# Altium PCB BMS_V5.PcbDoc
Units mm, origin at the board's own origin, x right, y up, seen from the top; angles counter-clockwise.
Board outline 100 x 100 mm, 2 copper layers (Top Layer, Bottom Layer); 68 components, 40 nets, 156 pads, 41 vias.
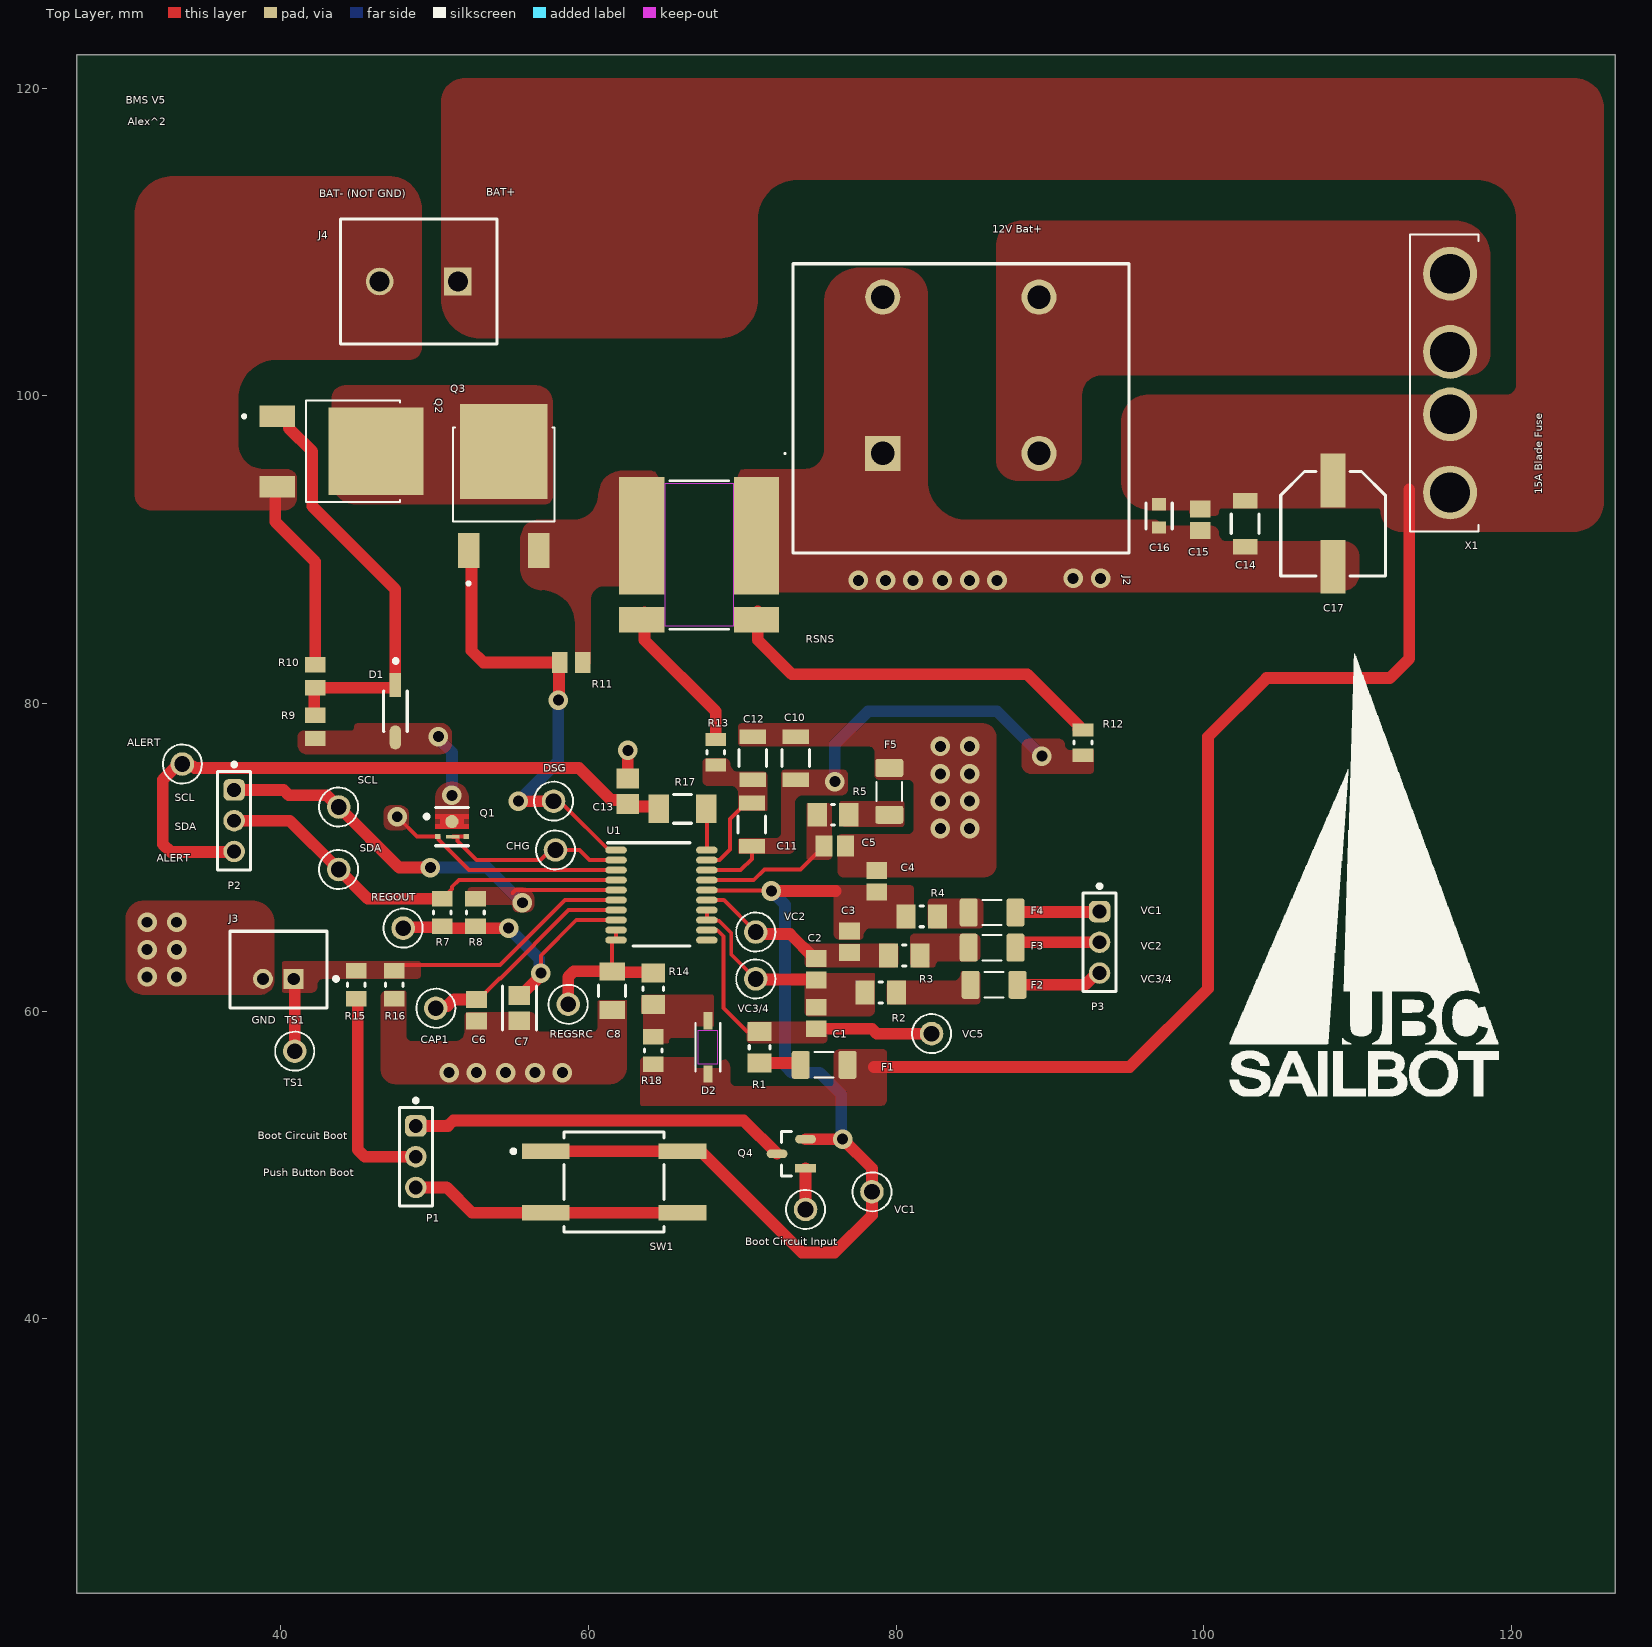
[diagram p0: Top Layer view]
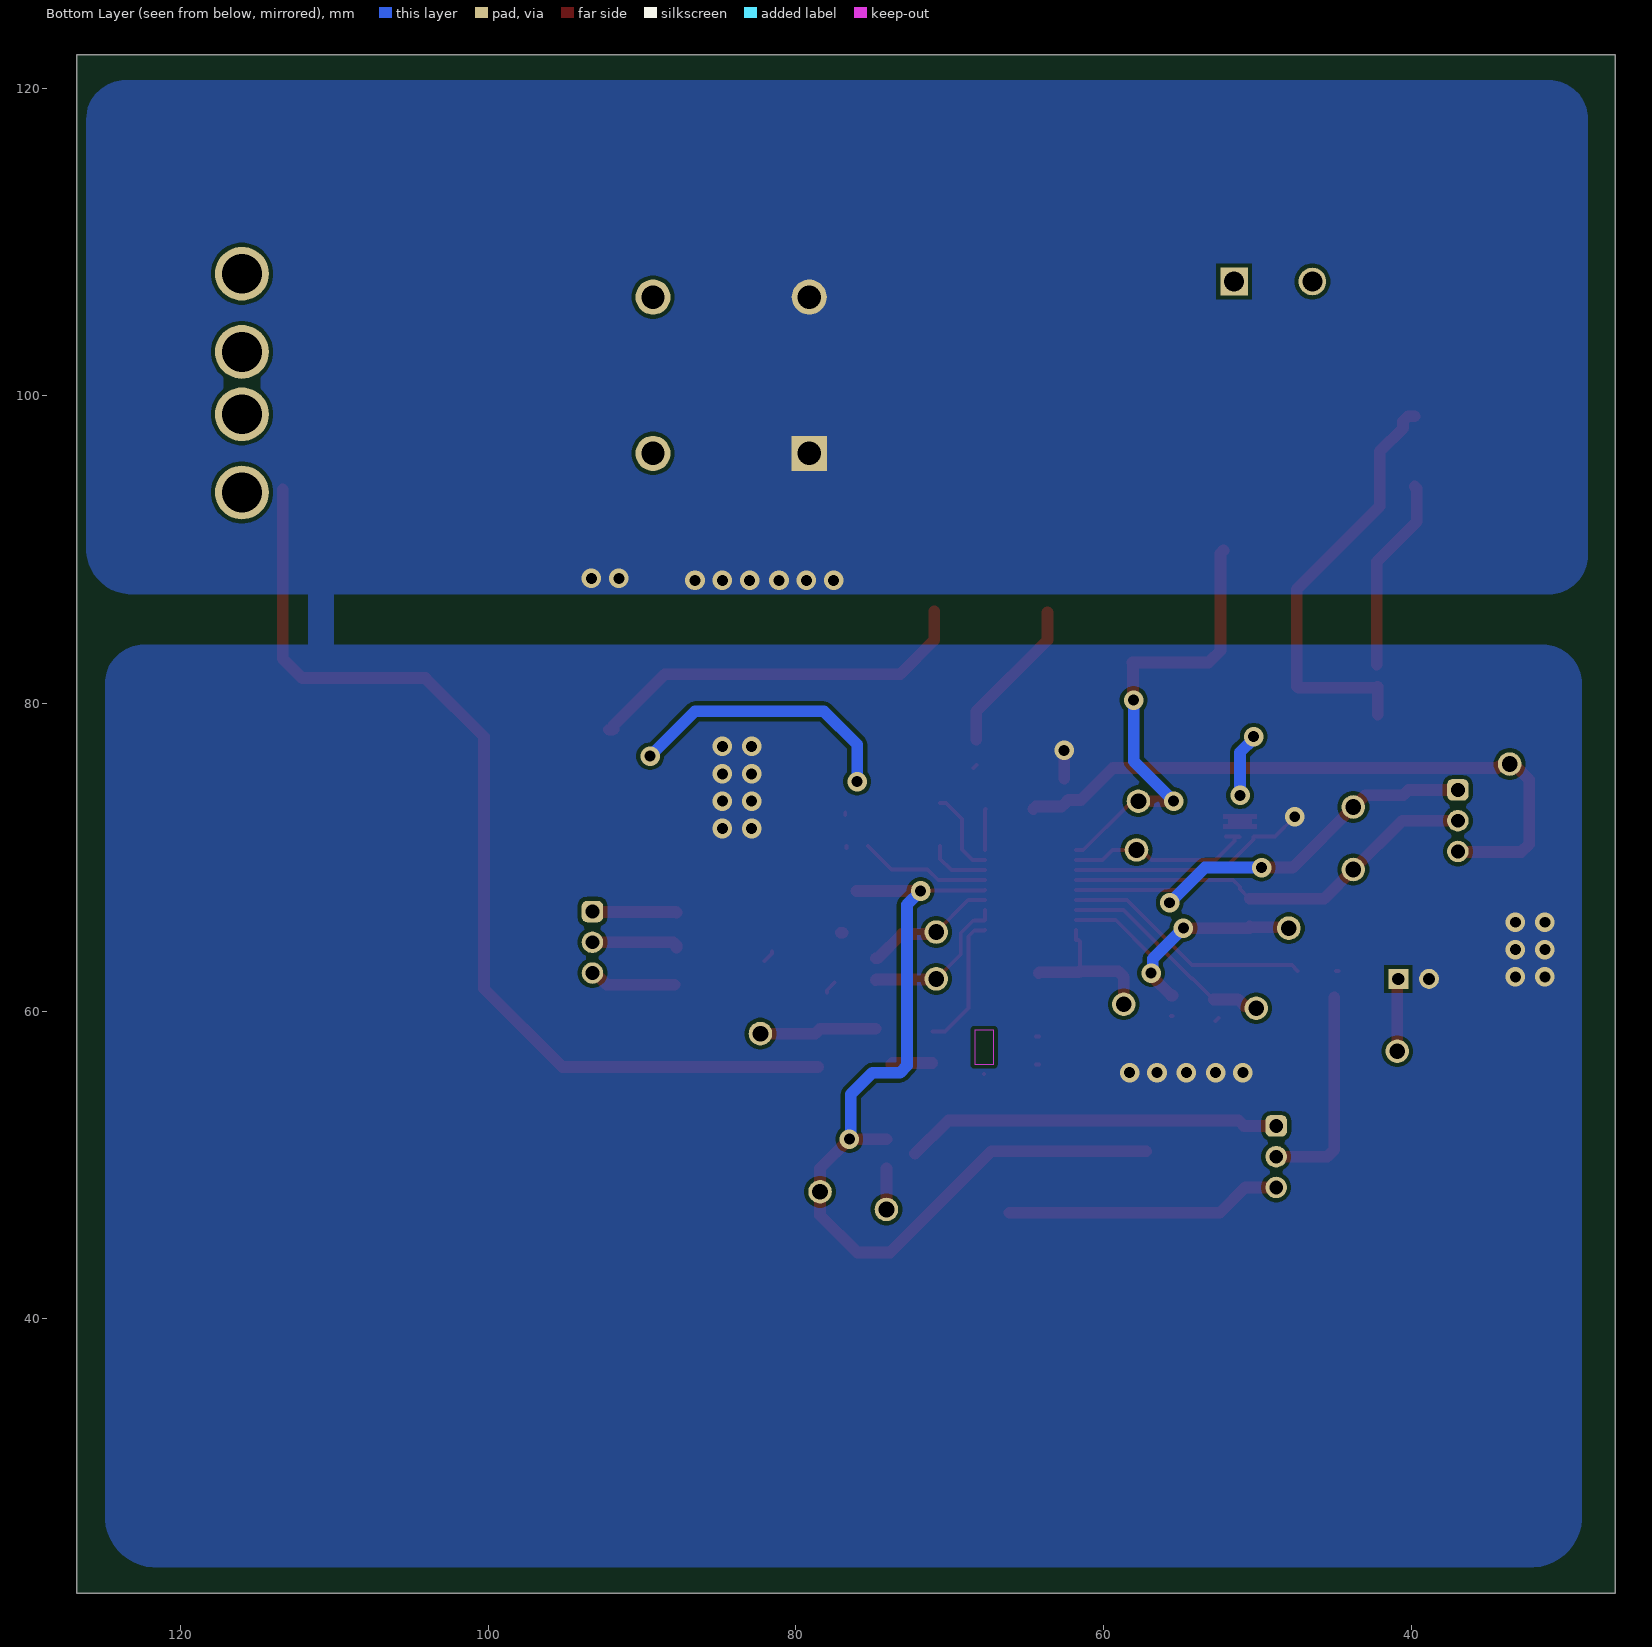
[diagram p1: Bottom Layer view, seen from below]

## Layer stack, top to bottom
Top Solder: solder mask 0.0102, Solder Resist, Dk 3.5
Top Layer: signal copper 0.0356
Dielectric 1: dielectric 0.32, FR-4, Dk 4.8
Bottom Layer: signal copper 0.0356
Bottom Solder: solder mask 0.0102, Solder Resist, Dk 3.5

## Board outline
26.733,22.174 26.733,122.174 126.734,122.174 126.734,22.174

## Design rules (kind name [scope] priority, off if disabled: settings)
Clearance [All] p1: gap=0.254 ignorepadtopadclearanceinfootprint=TRUE
HoleSize [All] p1: absolutevalues=TRUE maxlimit=2.59 minlimit=0.025 maxpercent=80.000 minpercent=20.000
PolygonConnect [All] p1: connectstyle=Direct reliefconductorwidth=0.254 reliefentries=4 polygonreliefangle="90 Angle" airgapwidth=0.254
RoutingVias [All] p1: holewidth=0.711 width=1.27 viastyle="Through Hole" minholewidth=0.711 minwidth=1.27 maxholewidth=0.711 maxwidth=1.27
SilkToSolderMaskClearance [IsPad] p1: minsilkscreentomaskgap=0.178 clearancetoexposedcopper=TRUE
SolderMaskExpansion [All] p1: expansion=0.102 istentingtop=FALSE
SupplyNets "Schematic Supply Nets_1" [InNet('BAT+')] p1: voltage=0.000
SupplyNets "Schematic Supply Nets" [InNet('GND')] p2: voltage=0.000
Width [All] p1: maxlimit=0.762 minlimit=0.254 preferedwidth=0.762
28 further rules are at their usual default settings.

## Components (designator, comment, footprint, x,y, rotation, side; value= is the part's Value field where it differs from the comment)
ALERT "5001" KEYSTONE_5001 33.591,76.073 r0 top
"Boot Circuit Input" "5001" KEYSTONE_5001 74.105,47.117 r90 top
C1 "1uF" CAPC2013X140X50LL20T25 74.803,59.563 r270 top
C2 "1uF" CAPC2013X140X50LL20T25 74.803,62.738 r270 top
C3 "1uF" CAPC2013X140X50LL20T25 76.962,64.516 r270 top
C4 "1uF" CAPC2013X140X50LL20T25 78.74,68.453 r270 top
C5 "1uF" CAPC2013X140X50LL20T25 76.01,70.739 r0 top
C6 "1uF" CAPC2013X140X50LL20T25 52.705,60.071 r90 top
C7 "GRM21BR61H475KE51L" FP-GRM21B-0_15-IPC_B 55.499,60.198 r270 top
C8 "TMK316B7225KLHT" FP-1206-L_3_2_0_15-W_1_6-IPC_C 61.531,61.341 r270 top
C10 "C1206C104M4JACAUTO" FP-C1206C-EB-MFG 73.469,76.454 r90 top value="0.10 μF"
C11 "C1206C104M4JACAUTO" FP-C1206C-EB-MFG 70.612,72.136 r270 top value="0.10 μF"
C12 "C1206C104M4JACAUTO" FP-C1206C-EB-MFG 70.675,76.454 r270 top value="0.10 μF"
C13 "470pF" CAPC2013X145X48NL20T23 62.547,74.295 r90 top
C14 "12061C104KAZ2A" FP-1206-L_3_2_0_2-W_1_6_0-MFG 102.679,91.694 r270 top
C15 "1uF" CAPC2013X140X50LL20T25 99.758,91.948 r90 top
C16 "CC0603KRX7R9BB103" FP-CC0603-DA-MFG 97.091,92.202 r270 top value="10 nF"
C17 "865080545012" WCAP-ASLI_D6.3H7.7 108.394,91.694 r90 top
CAP1 "5001" KEYSTONE_5001 50.068,60.198 r0 top
CHG "5001" KEYSTONE_5001 57.848,70.485 r0 top
D1 "1N5819HW" FP-SOD123-IPC_A 47.434,79.502 r270 top
D2 "1N4148W-7-F" SOD123_DIO 67.754,57.658 r270 top
DSG "5001" KEYSTONE_5001 57.721,73.66 r0 top
F1 "0ZCJ0005FF2E" FUSC3216X85N 75.311,56.515 r0 top
F2 "0ZCJ0005FF2E" FUSC3216X85N 86.36,61.722 r0 top
F3 "0ZCJ0005FF2E" FUSC3216X85N 86.233,64.135 r0 top
F4 "0ZCJ0005FF2E" FUSC3216X85N 86.233,66.421 r0 top
F5 "0ZCJ0005FF2E" FUSC3216X85N 79.546,74.295 r90 top
J2 "39970-0102" 399700102 79.121,96.266 r0 top
J3 "440054-2" FP-440054-2-MFG 39.83,62.703 r0 top
J4 "1729128" PHOE-1729128-2_V 48.959,107.442 r180 top
P1 "62000311121" 62000311121 48.768,50.546 r270 top
P2 "62000311121" 62000311121 36.957,72.39 r270 top
P3 "62000311121" 62000311121 93.218,64.484 r270 top
Q1 "SQA405EJ-T1_GE3" FP-SQA405EJ-T1_GE3-MFG 51.117,72.009 r270 top
Q2 "TSM090N03CPROG" TRANS_TSM090N03CP_ROG 43.942,96.393 r0 top
Q3 "TSM090N03CP_ROG" TRANS_TSM090N03CP_ROG 54.483,94.148 r90 top
Q4 "2N7002NXAKR" FP-SOT23-IPC_B 73.179,50.734 r180 top
R1 "100" RESC2013X60X30ML20T20 71.12,57.658 r90 top
R2 "100" RESC2013X60X30ML20T20 78.994,61.214 r180 top
R3 "100" RESC2013X60X30ML20T20 80.518,63.627 r180 top
R4 "100" RESC2013X60X30ML20T20 81.661,66.167 r180 top
R5 "100" RESC2013X60X30ML20T20 75.882,72.771 r180 top
R7 "10K" RESC2013X60X35NL10T20 50.482,66.421 r270 top
R8 "10K" RESC2013X60X35NL10T20 52.642,66.421 r270 top
R9 "1M Ohm" RESC2013X60X40LL20T25 42.227,78.486 r270 top
R10 "ERA-6AEB105V" RESC2013X60X40LL20T25 42.227,81.788 r270 top
R11 "ERA-6AEB105V" RESC2013X60X40LL20T25 58.864,82.677 r180 top
R12 "100" RESC2013X50X30LL20T20 92.138,77.47 r270 top
R13 "100" RESC2013X50X30LL20T20 68.263,76.835 r270 top
R14 "100" RESC2013X60X30ML20T20 64.198,61.468 r270 top
R15 "10K" RESC2013X60X35NL10T20 44.895,61.722 r270 top
R16 "10K" RESC2013X60X35NL10T20 47.371,61.722 r270 top
R17 "" FP-CRMA1206-IPC_A 66.103,73.152 r0 top
R18 "10K" RESC2013X60X35NL10T20 64.198,57.448 r90 top
REGOUT "5001" KEYSTONE_5001 47.942,65.405 r0 top
REGSRC "5001" KEYSTONE_5001 58.674,60.452 r90 top
RSNS "WSL36375L000FEA" WSL3637_VIS 67.183,89.662 r180 top (schematic designator Rsns)
SCL "5001" KEYSTONE_5001 43.752,73.279 r0 top
SDA "5001" KEYSTONE_5001 43.752,69.215 r0 top
SW1 "1571634-2" FP-1571634-2-MFG 61.658,48.895 r0 top
TS1 "5001" KEYSTONE_5001 40.894,57.404 r0 top
U1 "BQ7692006PW" PW0020A_N 64.735,67.553 r0 top
VC1 "5001" KEYSTONE_5001 78.422,48.26 r0 top
VC2 "5001" KEYSTONE_5001 70.866,65.151 r0 top
VC3/4 "5001" KEYSTONE_5001 70.866,62.103 r0 top
VC5 "5001" KEYSTONE_5001 82.296,58.547 r0 top
X1 "3522-2" FUSE_3522-2 115.633,100.838 r270 top

## Footprints (in the part's own frame and the unit in brackets; to place one, negate y for a bottom-side part, rotate by r counter-clockwise, add the part's x,y. Pads: shape width x height; smd on the part's side, far side on the other; paste and mask are expansions set on the pad)
399700102 [mm]
  rect 2.28x2.28 hole 1.52: 1(0,0)
  round 2.28 hole 1.52: 2(0,10.16) 3(10.16,0) 4(10.16,10.16)
  silkscreen extent -6.4,-6.47 16,12.33
62000311121 [mm] "Pin Header, pitch 2.00 mm, THT, Vertical, single row, 3p"
  rrect50% 1.4x1.4 hole 0.9: 1(-2,0)
  round 1.4 hole 0.9: 2(0,0) 3(2,0)
  silkscreen extent -3.77,-1.07 3.2,1.07, body extent -3,-1 3,1, height 6.05
CAPC2013X140X50LL20T25 [mm] "Chip Capacitor, 2-Leads, Body 2.00x1.25mm, IPC High Density"
  rect 1.1x1.35 smd: 1(-0.7,0) 2(0.7,0)
  body extent -1.1,-0.72 1.1,0.72, height 1.4
CAPC2013X145X48NL20T23 [mm] "Chip Capacitor, 2-Leads, Body 2.00x1.25mm, IPC Medium Density"
  rect 1.3x1.45 smd: 1(-0.825,0) 2(0.825,0)
  body extent -1.1,-0.72 1.1,0.72, height 1.45
FP-1206-L_3_2_0_2-W_1_6_0-MFG [mm]
  rect 1x1.6 smd paste+0 mask+0: 1(-1.5,0) 2(1.5,0)
  silkscreen extent -0.63,-0.9 0.63,0.9, body extent -2.1,-1 2.1,1, height 0.25
FP-1206-L_3_2_0_15-W_1_6-IPC_C [mm]
  rect 1.155x1.658 smd paste+0 mask+0: 1(-1.251,0) 2(1.251,0)
  silkscreen extent -0.37,-0.87 0.37,0.87, body extent -1.93,-0.97 1.93,0.97, height 0.25
FP-440054-2-MFG [mm]
  rect 1.3x1.3 hole 0.8 paste-2539.97 mask+0: 1(1,-0.6)
  round 1.3 hole 0.8 paste-2539.97 mask+0: 2(-1,-0.6)
  silkscreen extent -3.15,-2.5 3.88,2.5, body extent -3.25,-2.6 3.25,2.6, height 0.25
FP-1571634-2-MFG [mm]
  rect 3.1x1 smd paste+0 mask+0: 1(-4.45,2) 2(4.45,2) 3(-4.45,-2) 4(4.45,-2)
  silkscreen extent -6.67,-3.25 3.25,3.25, body extent -6.1,-3.35 6.1,3.35, height 0.25
FP-C1206C-EB-MFG [mm]
  rect 0.95x1.7 smd paste+0 mask+0: 1(-1.4,0) 2(1.4,0)
  silkscreen extent -0.55,-0.9 0.55,0.9, body extent -2,-1 2,1, height 0.25
FP-CC0603-DA-MFG [mm]
  rect 0.8x0.9 smd paste+0 mask+0: 1(-0.75,0) 2(0.75,0)
  silkscreen extent -0.85,-0.85 0.85,0.85, body extent -1.35,-0.75 1.35,0.75, height 0.25
FP-CRMA1206-IPC_A [mm]
  rect 1.343x1.858 smd paste+0 mask+0: 1(-1.548,0) 2(1.548,0)
  silkscreen extent -0.58,-0.93 0.58,0.93, body extent -2.72,-1.43 2.72,1.43, height 0.25
FP-GRM21B-0_15-IPC_B [mm]
  rect 1.206x1.408 smd paste+0 mask+0: 1(-0.826,0) 2(0.826,0)
  silkscreen extent -1.43,-1.1 1.43,1.1, body extent -1.68,-0.95 1.68,0.95, height 0.25
FP-SOD123-IPC_A [mm]
  rect 1.557x0.742 smd paste+0 mask+0: 1(-1.7,0)
  rrect100% 1.557x0.742 smd paste+0 mask+0: 2(1.7,0)
  silkscreen extent -3.39,-0.77 1.33,0.77, body extent -2.98,-1.28 2.98,1.28, height 0.25
FP-SOT23-IPC_B [mm]
  rect 1.355x0.562 smd paste+0 mask+0: 1(-0.925,0.95)
  rrect100% 1.355x0.562 smd paste+0 mask+0: 2(-0.925,-0.95) 3(0.925,0)
  silkscreen extent 0,-1.45 0.65,1.45, body extent -1.85,-1.7 1.85,1.7, height 0.25
FP-SQA405EJ-T1_GE3-MFG [mm]
  round 0.855 smd paste+0 mask+0: 1-2-5-6(-0.325,0)
  rect 0.3x0.35 smd paste+0 mask+0: 3(0.65,-0.925) 4(0.65,0.925)
  rect 0.235x0.87 smd paste+0 mask+0: 7(0.667,0.04)
  Top Layer region: -0.8,1.1 -0.8,-1.1 -0.5,-1.1 -0.5,-0.75 -0.15,-0.75 -0.15,-1.1 0.15,-1.1 0.15,1.1 -0.15,1.1 -0.15,0.75 -0.5,0.75 -0.5,1.1 -0.8,1.1
  silkscreen extent -1.25,-1.77 1.25,1.07, body extent -1.17,-1.2 1.17,1.2, height 0.25
FUSC3216X85N [mm]
  rrect25% 1.17x1.82 smd paste+0 mask+0.102: 1(-1.52,0) 2(1.52,0)
  silkscreen extent -0.62,-0.82 0.62,0.82
FUSE_3522-2 [mm]
  round 3.5 hole 2.59: 1A(-7.11,0.37) 1B(-2.03,0.37) 2A(2.03,0.37) 2B(7.11,0.37)
  silkscreen extent -9.65,-2.22 9.65,2.22
KEYSTONE_5001 [mm]
  round 1.53 hole 1.02: TP(0,0)
  silkscreen extent -1.27,-1.27 1.27,1.27, body extent -1.27,-1.27 1.27,1.27, height 4.57
PHOE-1729128-2_V [mm] "Receptacle, 2-Leads, Body 8.1x10.16mm, Pitch 5.08mm"
  rect 1.8x1.8 hole 1.3: 1(-2.54,0)
  round 1.8 hole 1.3: 2(2.54,0)
  silkscreen extent -5.08,-4.05 5.08,4.05, body extent -5.65,-4.05 5.08,4.05, height 10.01
PW0020A_N [mm]
  oval 1.4x0.45 smd paste+0 mask+0: 1(-2.95,2.925) 2(-2.95,2.275) 3(-2.95,1.625) 4(-2.95,0.975) 5(-2.95,0.325) 6(-2.95,-0.325) 7(-2.95,-0.975) 8(-2.95,-1.625) 9(-2.95,-2.275) 10(-2.95,-2.925) 11(2.95,-2.925) 12(2.95,-2.275) 13(2.95,-1.625) 14(2.95,-0.975) 15(2.95,-0.325) 16(2.95,0.325) 17(2.95,0.975) 18(2.95,1.625) 19(2.95,2.275) 20(2.95,2.925)
  silkscreen extent -3.5,-3.3 1.85,3.4
RESC2013X50X30LL20T20 [mm] "Chip Resistor, 2-Leads, Body 2.00x1.25mm, IPC High Density"
  rect 0.85x1.35 smd: 1(-0.825,0) 2(0.825,0)
  silkscreen extent -0.1,-0.58 0.1,0.58, body extent -1.1,-0.72 1.1,0.72, height 0.5
RESC2013X60X30ML20T20 [mm] "Chip Resistor, 2-Leads, Body 2.00x1.25mm, IPC Low Density"
  rect 1.25x1.55 smd: 1(-1.025,0) 2(1.025,0)
  silkscreen extent -0.1,-0.67 0.1,0.67, body extent -1.1,-0.72 1.1,0.72, height 0.6
RESC2013X60X35NL10T20 [mm] "Chip Resistor, 2-Leads, Body 2.1x1.35mm, IPC Medium Density"
  rect 1x1.35 smd: 1(-0.9,0) 2(0.9,0)
  silkscreen extent -0.1,-0.58 0.1,0.58, body extent -1.05,-0.68 1.05,0.67, height 0.6
RESC2013X60X40LL20T25 [mm] "Chip Resistor, 2-Leads, Body 2.00x1.25mm, IPC High Density"
  rect 1x1.35 smd: 1(-0.75,0) 2(0.75,0)
  body extent -1.1,-0.72 1.1,0.72, height 0.6
SOD123_DIO [mm]
  rect 1.111x0.601 smd paste+0 mask+0: 1(-1.725,0) 2(1.725,0)
  Keep-Out Layer region: -1.119,-0.624 -1.119,0.624 1.119,0.624 1.119,-0.624
  silkscreen extent -1.55,-0.8 1.55,0.8, body extent -1.92,-0.67 1.92,0.67, height 0.81
TRANS_TSM090N03CP_ROG [mm]
  rect 2.29x1.4 smd: 1(-4.19,2.285) 3(-4.19,-2.285)
  rect 6.18x5.69 smd paste-4: 2(2.245,0)
  silkscreen extent -6.43,-3.3 3.79,3.3
WCAP-ASLI_D6.3H7.7 [mm] "Aluminium Electrolytic V-Chip SMT Capacitors, 6.3x7.7mm"
  rect 3.5x1.6 smd: 1(2.8,0) 2(-2.8,0)
  silkscreen extent -3.4,-3.4 3.4,3.4, body extent -3.65,-3.3 3.65,3.3, height 7.7
WSL3637_VIS [mil]
  rect 116x300 smd paste+0 mask+0: 1(-147,-49) 4(147,-49)
  rect 116x66 smd paste+0 mask+0: 2(-147,166) 3(147,166)
  Top Layer keep-out region: -87,-183 -87,183 87,183 87,-183
  silkscreen extent -76,-190 76,190

## Part data
ALERT "Boot Circuit Input" CAP1 CHG DSG F1 F2 F3 F4 F5 Q3 REGOUT REGSRC SCL SDA TS1 VC1 VC2 VC3/4 VC5 X1: Package=None, Availability=Unavailable, Price=None
  ALERT "Boot Circuit Input" CAP1 CHG DSG REGOUT REGSRC SCL SDA TS1 VC1 VC2 VC3/4 VC5: MF="Keystone Electronics", MP=5001
  F1 F2 F3 F4 F5: MF="{'manufacturer': u'Bel Fuse Inc.'}", MP=0ZCJ0005FF2E
  Q3: MP=TSM090N03CP_ROG
  X1: MF="{'manufacturer': u'Keystone Electronics'}", MP=3522-2
C1 C2 C3 C4 C5 C6 C15: library part CMP-2007-03234-1, Manufacturer=Kemet, Part Number=C0805C105K3RACTU
C7: library part CMP-06035-059131-1, "Chip Multilayer Ceramic Capacitors for General Purpose, 0805, 4.7uF, X5R, 15%, 10%, 50V", Capacitance=4.7uF, Case Code (Imperial)=0805, Case Code (Metric)=2012, Dielectric=X5R, Max Operating Temperature=85°C, Min Operating Temperature=-55°C, Tolerance=10%, Voltage Rating=50V, Case/Package=0805, Depth=1.25mm, Height=1.25mm, Lead Free="Lead Free", Length=2mm, Material=Ceramic, Mount="Surface Mount", Packaging="Tape and Reel", REACH SVHC="No SVHC", Thickness=0.055inch, Voltage Rating (DC)=50V, Width=0.049inch
C8: library part CMP-14477-002871-2, "None", Capacitance=2.2uF, Case Code (Imperial)=1206, Case Code (Metric)=3216, Dielectric=X7R, Max Operating Temperature=125°C, Min Operating Temperature=-55°C, Package Quantity=2000, Ratings=AEC-Q200, Tolerance=10%, Voltage Rating=25V, Case/Package=1206, Halogen Free="Halogen Free", Height=1.6mm, Lead Free="Lead Free", Length=0.126inch, Mount="Surface Mount", Packaging="Tape and Reel", RoHS Compliant=Yes, Termination=SMD/SMT, Thickness=0.071inch, Voltage Rating (DC)=25V, Width=0.063inch
C10 C11 C12: library part CMP-03020-020536-1, "C1206 0.10 μF U2J 20.00% 16 V", Capacitance="0.10 μF", Manufacturer=KEMET, Package=C1206C-EB, Temperature="-55°C to +150°C", Temperature Characteristic=U2J, Temperature Coefficient=15%, Temperature Range High=+150°C, Temperature Range Low=-55°C, Tolerance=0.2, Voltage Rating="16 V", Automotive=Yes, Automotive Grade="Grade 0", Category=Cap, ComponentLink2Description=Datasheet, ComponentLink2URL=https://content.kemet.com/datasheets/KEM_C1007_X8R_ULTRA_150C_SMD.pdf, Device Class L1="Passive Components", Device Class L2=Capacitors, Device Class L3="Ceramic Capacitors", Height=0.88mm, Ipc Land Pattern Name=CAPC320160X78, Lead Free=Yes, Manufacturer Part Number=C1206C104M4JACAUTO, Material=Ceramic, Octopart=https://octopart.com/c1206c104m4jacauto-kemet-84732525, RoHS=TRUE
C13: library part CMP-2007-01712-1, Manufacturer=Vitramon, Part Number=VJ0805Y471KXAAC
C14: library part CMP-04427-004798-1, "General Purpose Ceramic Capacitor, 1206, 100nF, 10%, X7R, 15%, 100V", Capacitance=100nF, Case Code (Imperial)=1206, Case Code (Metric)=3216, Dielectric=X7R, Max Operating Temperature=125°C, Min Operating Temperature=-55°C, Package Quantity=1, Tolerance=10%, Voltage Rating=100V, Case/Package=1206, Construction=Flat, Depth=1.6mm, Features="Soft Termination", Lead Free="Lead Free", Length=3.2mm, Mount="Surface Mount", Number of Pins=2, Packaging="Tape and Reel", Radiation Hardening=No, REACH SVHC="No SVHC", RoHS Compliant=Yes, Series=FLEXITERM®, Termination=SMD/SMT, Thickness=0.05inch, Voltage Rating (DC)=100V, Width=0.063inch
C16: library part CMP-2100-03600-2, "CAP CER 10000PF 50V X7R 0603", Capacitance="10 nF", Manufacturer=YAGEO, Package=CC0603-DA, Temperature="-55°C to +125°C", Temperature Characteristic=X7R, Temperature Coefficient=15%, Temperature Range High=+125°C, Temperature Range Low=-55°C, Tolerance=0.1, Voltage="50 V", Automotive=No, Category=Cap, ComponentLink2Description=Datasheet, ComponentLink2URL=http://www.yageo.com/documents/recent/UPY-GPHC_X7R_6.3V-to-50V_18.pdf, Device Class L1="Passive Components", Device Class L2=Capacitors, Device Class L3="Ceramic Capacitors", Digikey Description="CAP CER 10000PF 50V X7R 0603", Footprint Url=http://www.yageo.com/exep/pages/download/literatures/UPY-C_GEN_24.pdf, Height=0.9mm, Lead Free=Yes, Manufacturer Part Number=CC0603KRX7R9BB103, Material=Ceramic, Mouser Description="Multilayer Ceramic Capacitor, CC Series, 0.01 - F, - 10%, X7R, 50 V, 0603 [1608 Metric]", Octopart=https://octopart.com/cc0603krx7r9bb103-yageo-192938, RoHS=TRUE, Voltage Rating="50 V"
C17: library part CMP-03913-54202496-1, "865080545012 Cap Aluminum Lytic 100uF 35V 20% (6.3 X 7.7mm) SMD 300mA 2000h 105C T/R", Capacitance=100µF, Case/Package=Radial, ESR (Equivalent Series Resistance)=321.392mΩ, Insulation Resistance=1MΩ, Leakage Current=35µA, Max Operating Temperature=105°C, Min Operating Temperature=-55°C, Ripple Current=300mA, Tolerance=20%, Voltage Rating=35V, Diameter=6.3mm, Dissipation Factor=14%, Height=7.7mm, Impedance=380mΩ, Length=7.7mm, Life (Hours)=2000hours, NexarPartId=54202496, Packaging="Cut Tape", REACH SVHC=Unknown, Ripple Current (AC)=300mA, RoHS=Compliant, Voltage Rating (DC)=35V, Width=6.6mm
D1: library part CMP-0303-00003-3, "DIODE SCHOTTKY 40V 1A SOD123", Average Rectified Current=1A, Capacitance=110pF, Case/Package=SOD-123-2, Forward Voltage=450mV, Max Forward Surge Current (Ifsm)=25A, Max Operating Temperature=125°C, Max Power Dissipation=450mW, Max Repetitive Reverse Voltage (Vrrm)=40V, Min Operating Temperature=-65°C, Package Quantity=3000, Peak Reverse Current=50uA, Contact Plating=Tin, Current Rating=1A, Element Configuration=Single, Forward Current=1A, Height=1.25mm, Lead Free="Lead Free", Length=2.85mm, Max Reverse Voltage (DC)=40V, Number of Pins=2, Output Current=1A, Packaging="Tape and Reel", Peak Non-Repetitive Surge Current=25A, Polarity=Standard, Radiation Hardening=No, REACH SVHC="No SVHC", Termination=SMD/SMT, Voltage Rating (DC)=40V, Weight=0.000353oz, Width=1.7mm
D2: "DIODE; SWT; SMT (SOD-123); PIV=100V; IF=0.3A; -65 DEGC TO +150 DEGC", Manufacturer_Name="Diodes Inc", Copyright="Copyright (C) 2025 Ultra Librarian. All rights reserved.", Manufacturer_Part_Number=1N4148W-7-F
J2: "10.16mm Beau Eurostyle Fixed Mount PCB Terminal Block, High Power 40A,  Circuits", Manufacturer_Name=Molex, Mouser Part Number=538-39970-0102, Datasheet Link=https://www.molex.com/pdm_docs/sd/399700102_sd.pdf, Geometry.Height=30mm, Manufacturer_Part_Number=39970-0102, Mouser Price/Stock=https://www.mouser.co.uk/ProductDetail/Molex/39970-0102?qs=E1QQzziZK0%252BNAsw%2FMf08Pw%3D%3D
J3: library part CMP-03369-000005-1, "CONN HEADER VERT 2POS 2MM", Current Rating=3A, Manufacturer="TE Connectivity", Temperature="-25°C to +85°C", Temperature Range High=+85°C, Temperature Range Low=-25°C, Voltage Rating=250V, Automotive=No, Category=Conn, ComponentLink2Description=Datasheet, ComponentLink2URL=https://www.te.com/usa-en/product-440054-2.datasheet.pdf, Conn Gender=Male, Conn Orientation=Vertical, Contact Material=Tin,Nickel, Device Class L1=Connectors, Device Class L2="Headers and Wire Housings", Device Class L3=unset, Digikey Description="CONN HEADER VERT 2POS 2MM", Footprint Url=https://www.te.com/commerce/DocumentDelivery/DDEController?Action=showdoc&DocId=Customer+Drawing%7F440054%7FF6%7Fpdf%7FEnglish%7FENG_CD_440054_F6.pdf%7F440054-2, Height=6.35mm, Lead Free=Yes, Manufacturer Part Number=440054-2, Mouser Description="Headers & Wire Housings 2.0mm HDR 2pos VERT HPI", Number of Contacts=2, Number of Rows=1, Octopart=https://octopart.com/440054-2-te+connectivity-40237927, Package=440054-2, Pitch=2mm, RoHS=TRUE
J4: library part CMP-2000-05815-1, "PCB Terminal Block, 13.5 A, 400 V, 2-Pin THD, RoHS, Bulk", Current Rating=13500mA, Manufacturer="Phoenix Contact", Package Description="2-Pin Through Hole Device, Body 8.1 x 10.16 mm, Pitch 5.08 mm", Package Reference=1729128-2, Package Version=03/2015, Voltage Rating=400V, Datasheet URL=https://datasheet.ciiva.com/16046/1729128-16046181.pdf, Datasheet Version=12/2013, Manufacturer URL=http://www.phoenixcontact.com/, Mounting Technology=ThroughHole, No. of Positions=2, No. of Rows=1, Orientation=Horizontal, Package URL=https://www.phoenixcontact.com/online/portal/pi/pxc/product_detail_page/!ut/p/b1/3VdJjqNKFDxLH8AFycySyWY2ozFsEPOMMQaDOX1XedGL_1Vdm5YXJleknhSKeBkvI6EA8ncAo3AYoDhBQGco6KN7VURTdemj9us_IEKEZo_YHiPAEWEFmDGOHMORkqKYCORBZxgL7ZoaZYcbFFUZ3fqxSY6GOuxydWUuHqz1ynmMFygu583Bob0Ewr6Sd_l-5m-kAueHiB0jpRwZwe58wwtkpxtMYd_LmGcDRU02dRNEyWt6Y2ti5pSyJ_reIkzIulrqApdnbT11V5jnCKbYNCvhEM1MCpPByat_X379-iThf08CI5GfOPqfBeS3BRoBOdD55AKVv0iLwCMq-2BrzXWSGRH7pUGD9uwXQjiph3xL0DKQwdGa0JImiIOmBNOestqgwTHSSs2oOep-78apyXQBvNi8ZLaFjvjWvcaUEBu0MC6Wbe-d6mB0FAebo2lUWinqYaZs5DAYzV0RP9yitUjnGJ0iI9xhZkT42OCQNUJJhkgWINNQLP2JFP6OpMg3JCVg70jqHT0lvKOnhHf0lPuOnnLf0VPuWx6_dxwUIvwk5WMkT0kLL1mh61l2yZVSzG3pYV_bqo-mj6uMKwKwdnnW8Jh5RTOJzMOA5c-eJDaZQw4mTMPH02PvS_ZAqNVjVTo2WyYLkwH_KU1mmmG5kjRhDqPXLwwVHvVOjCM60-fpXvTDfMGW1PVFVS1r4e4yVDk4ZdNbkUHvqPqQSeian4UD39fNKmachqdJ1NJbyk8rXT9mXTvPk3oE5meulKGgiruPJek-4I9hTT6G8ZLOyRSm2RRVbThERQad5OS28hdt4YW4vG0stgYYzsWsK4_7y6DZMjJSCqri1kyiZR5vD7pwIrNR7QwPHTcLTI5qT7eRlpHrdGiupYlqQDJ7zy_CND8fWWBoLRXxk1RVcXiBQwbTD4Xi7KL-FuO94t9xaqweXzH, Packing=Bulk, PartNumber=1729128, Pitch=5.08mm, RoHS=TRUE
P1 P2 P3: library part CMP-1502-00957-4, Contact Resistance=20mΩ, Current Rating=2A, Max Operating Temperature=105°C, Min Operating Temperature=-40°C, Operating Supply Voltage=200V, Contact Material=Gold, Gender=Male, Height=6.35mm, Lead Pitch=2mm, NexarPartId=61924779, Number of Contacts=3, Number of Pins=3, Number of Rows=1, Orientation=Vertical, RoHS=Non-Compliant, Voltage Rating=200V
Q1: library part CMP-02550-000254-1, "MOSFET P-CH 40V 10A PPAK SC70-6"
Q2: library part CMP-013-00034-1, "N-Channel 30 V 50A (Tc) 40W (Tc) Surface Mount TO-252 (DPAK)", Case/Package="TO-252-3 Taiwan Semiconductor", Check_prices=https://www.snapeda.com/parts/TSM090N03CPROG/taiwan/view-part/?ref=eda, Component Type=Standard, Design Item ID=TSM090N03CPROG, MF="Taiwan Semiconductor", MP=TSM090N03CPROG, Pins=3, SnapEDA_Link=https://www.snapeda.com/parts/TSM090N03CPROG/taiwan/view-part/?ref=snap, Source=TSM090N03CPROG.SchLib
Q4: library part CMP-14409-000026-2, "2N7002NXAK/SOT23/TO-236AB"
R1 R2 R3 R4 R5 R14: library part CMP-2001-01991-1, Manufacturer="KOA Speer", Part Number=RK73H2ATTD1000F
R7 R8 R15 R16 R18: library part CMP-1659-00013-4, "Chip Resistor, 10 KOhm, +/- 1%, 0.125 W, -55 to 155 degC, 0805 (2012 Metric), RoHS, Tape and Reel", Manufacturer=Yageo, Max Operating Temperature="155 degC", Min Operating Temperature="-55 degC", Package Quantity=5000, Voltage Rating="150 V", ComponentLink1Description="Manufacturer URL", ComponentLink1URL=http://www.yageo.com/, ComponentLink2Description=Datasheet, ComponentLink2URL=http://www.yageo.com/documents/recent/PYu-RC_Group_51_RoHS_L_04.pdf, DatasheetVersion="Rev. 4, 02/2016", Height="0.5 mm", Length="2 mm", Mount="Surface Mount", Mounting Technology="Surface Mount", PackageDescription="2-Pin Surface Mounted Device, Body 2 x 1.25 mm", PackageReference=0805, Packaging="Tape and Reel", Pins=2, REACH SVHC="No SVHC", RoHSCompliant=true
R9: library part CMP-2001-00584-1, Manufacturer=Panasonic, Part Number=ERA-6AEB105V
R10 R11: library part CMP-2001-00584-1, Manufacturer=Panasonic, Part Number=ERA-6AEB105V
R12 R13: library part CMP-2001-04901-1, Manufacturer="Vishay Dale", Part Number=CRCW0805100RFKEA
R17: library part CMP-00030-87449095-1, "CRMA1206AF500KFKEF Res Thick Film 1206 500K Ohm 1% 0.3W ±100ppm/C Pad SMD Automotive T/R", Case/Package=1206, Max Operating Temperature=155°C, Min Operating Temperature=-55°C, Power Rating=300mW, Resistance=500kΩ, Temperature Coefficient=100ppm/°C, Tolerance=1%, Voltage Rating=1kV, Composition="Thick Film", Height=740µm, NexarPartId=87449095, RoHS=Non-Compliant, Schedule B="8533210045, 8533210045"
RSNS: library part CMP-009-00178-1, "WSL-3637 .005 1% EA e3", Manufacturer_Name=Vishay, Copyright="Copyright (C) 2025 Ultra Librarian. All rights reserved.", Design Item ID=WSL36375L000FEA, Manufacturer_Part_Number=WSL36375L000FEA, Source=WSL36375L000FEA.SchLib
SW1: library part CMP-03407-000008-1, "SWITCH TACTILE SPST-NO 0.05A 24V", Actuator Color=Natural, Case/Package=SMD/SMT, Contact Current Rating=50mA, Max Operating Temperature=85°C, Max Voltage Rating (DC)=12V, Min Operating Temperature=-40°C, Operating Force=160gf, Package Quantity=1000, Actuator Length=0.094inch, Actuator Material=Rubber, Actuator Type=Standard, Contact Material="Stainless Steel", Contact Plating=Silver, Current Rating=50mA, Depth=10mm, ELV=Compliant, Illumination Type=Illuminated, Lead Free="Lead Free", Length=6.2mm, Max Current Rating=50mA, Mechanical Life=5000000Cycles, Mount="Surface Mount", Orientation=Straight, Packaging="Tape and Reel", Radiation Hardening=No, RoHS Compliant=Yes, Switch Function=Off-Mom, Termination="Gull Wing", Throw Configuration=SPST, Type=Switch, Voltage Rating (DC)=12V
U1: "3 to 5-Series Cell Li-Ion and Li-Phosphate Battery Monitor (bq76940 Family) 20-TSSOP -40 to 85", Manufacturer_Name="Texas Instruments", Copyright="Copyright (C) 2025 Ultra Librarian. All rights reserved.", Datasheet=https://www.ti.com/lit/gpn/bq76920, Manufacturer_Part_Number=BQ7692006PW, RefDes=RefDes, Type=TYPE

## Via types
v1: diameter 1.27, hole 0.711, Top Layer to Bottom Layer, 41 vias

## Nets (pads, with @x,y where several pads share a name; then routed paths per layer and width w, separated by ;. In a path a pad name is that pad's centre, name@x,y a point inside that pad or via, vN(x,y) a via of type N, cw(c..) or ccw(c..) an arc to the next point about the centre after c; other vN are vias at no path point)
ALERT: ALERT.TP C13.1 P2.3 R17.1 | length 42.8
  Top Layer w0.762: ALERT.TP@33.465,76.2 32.322,75.057 32.322,70.866 32.83,70.358 P2.3@36.957,70.358 ; ALERT.TP 33.738,75.926 34.282,75.926 34.389,75.819 59.372,75.819 61.452,73.739 62.278,73.739 C13.1 62.707,73.311 64.397,73.311 R17.1
BAT+: C14.1 C15.2 C16.1 C17.1 D2.2 F1.2 J4.1 R18.1 X1.2A X1.2B | length 66.6
  Top Layer w0.254: R18.1 R18.1@64.373,56.548 ; D2.2 D2.2@67.779,55.909
  Top Layer w0.762: 78.549,56.379 95.178,56.379 100.266,61.468 100.266,77.851 104.076,81.661 112.078,81.661 113.347,82.931 113.347,93.915
BAT-: J4.2 Q2.3 R10.1 | length 12.7
  Top Layer w0.762: Q2.3 39.624,93.98 39.624,91.821 42.227,89.218 R10.1
CHG_FET: D1.1 Q2.1 R9.1 R10.2 | length 28.1
  Top Layer w0.254: R9.1@42.164,79.3 ccw(c42.227,79.3) R9.1
  Top Layer w0.762: Q2.1 40.197,98.678 40.516,98.359 40.516,97.914 42.037,96.393 42.037,92.837 47.434,87.439 D1.1 cw(c47.27,81.202) 47.27,81.038 R10.2 ; R9.1@42.164,79.3 R10.2@42.164,81.102
CHG_PIN: CHG.TP Q1.4 Q1.7 U1.2 | length 12.8
  Top Layer w0.254: Q1.4 52.034,71.35 51.166,71.35 Q1.7 51.456,71.342 51.466,71.332 51.466,71.072 52.71,69.828 56.885,69.828 57.542,70.485 CHG.TP 59.397,70.485 60.054,69.828 U1.2
DSG_PIN: DSG.TP Q3.1 R11.2 U1.1 | length 30.4
  Top Layer w0.254: DSG.TP 57.966,73.416 58.373,73.416 61.31,70.478 U1.1
  Top Layer w0.762: Q3.1 52.389,89.768 52.389,83.438 53.149,82.677 R11.2 58.075,82.638 58.075,80.265 v1(58.036,80.226) ; v1(55.435,73.66) DSG.TP
  Bottom Layer w0.762: v1(55.435,73.66) 58.036,76.26 v1(58.036,80.226)
GND: C4.1 C5.2 C6.1 C7.2 C8.2 C10.2 C12.1 C13.2 C14.2 C15.1 C16.2 C17.2 F5.2 J2.1 J2.2 J3.2 Q1.3 R16.2 RSNS.1 U1.3 | length 18.1
  Top Layer w0.254: v1(47.561,72.644) 48.847,71.359 Q1.3 ; Q1.3@50.218,71.359 50.241,71.336 50.241,71.167 52.23,69.178 U1.3 ; C6.1@52.524,59.552 C6.1 ; C7.2@55.499,59.689 C7.2@55.624,59.689 ; C5.2@76.709,70.614 C5.2
  Top Layer w0.762: C13.2 v1(62.547,76.962)
  other v1: 50.927,56.007 52.705,56.007 54.61,56.007 56.515,56.007 58.293,56.007 31.305,62.23 33.21,62.23 31.305,64.008 33.21,64.008 31.305,65.786 33.21,65.786 82.867,71.882 84.772,71.882 82.867,73.66 84.772,73.66 82.867,75.438 84.772,75.438 82.867,77.216 84.772,77.216 77.534,88.011 79.311,88.011 81.09,88.011 82.995,88.011 84.772,88.011 86.55,88.011 91.504,88.138 93.281,88.138
"NetBoot Circuit Input_TP": "Boot Circuit Input.TP" Q4.1 | length 2.7
  Top Layer w0.762: 74.105,47.117 Q4.1
NetC1_1: C1.1 C2.2 R2.2 U1.13 U1.14 VC3/4.TP | length 11.1
  Top Layer w0.254: U1.14 U1.13 67.723,65.89 68.337,65.89 68.343,65.884 68.48,65.884 69.275,65.089 69.275,63.694 VC3/4.TP ; R2.2@77.471,61.862 77.969,61.364 R2.2
  Top Layer w0.762: VC3/4.TP 70.898,62.071 74.771,62.071 C2.2
NetC1_2: C1.2 R1.2 U1.12 VC5.TP | length 16.5
  Top Layer w0.254: U1.12 67.723,65.24 68.337,65.24 68.343,65.234 68.412,65.234 68.767,64.879 68.767,60.202 70.285,58.683 R1.2
  Top Layer w0.762: C1.2 78.424,58.863 78.74,58.547 VC5.TP
NetC2_1: C2.1 C3.2 R3.2 U1.15 VC2.TP | length 8.7
  Top Layer w0.254: U1.15 68.789,67.228 VC2.TP
  Top Layer w0.762: VC2.TP 70.993,65.024 73.092,65.024 74.678,63.438 C2.1
NetC3_1: C3.1 C4.2 Q4.2 R4.2 SW1.1 SW1.2 U1.16 VC1.TP | length 60.7
  Top Layer w0.254: U1.16 67.716,67.848 71.852,67.848 v1(71.882,67.818)
  Top Layer w0.762: SW1.1 SW1.2 67.278,50.895 73.85,44.323 76.01,44.323 78.422,46.736 VC1.TP 78.422,49.784 v1(76.517,51.689) 76.515,51.687 74.107,51.687 Q4.2 ; v1(71.882,67.818) 76.073,67.818 ; C3.1@76.947,65.106 C3.1@77.072,65.106
  Bottom Layer w0.762: v1(71.882,67.818) 72.771,66.929 72.771,56.453 73.217,56.007 75.015,56.007 76.42,54.602 76.42,51.786 ccw(c76.517,51.786) v1(76.517,51.689)
NetC5_1: C5.1 R5.2 U1.17 | length 8.5
  Top Layer w0.254: U1.17 70.737,68.528 71.424,69.215 73.785,69.215 C5.1
NetC6_2: C6.2 CAP1.TP U1.7 | length 14.4
  Top Layer w0.254: C6.2@52.83,60.771 54.2,62.141 54.269,62.141 58.706,66.578 U1.7
  Top Layer w0.762: CAP1.TP 50.215,60.345 50.82,60.345 51.246,60.771 C6.2@52.83,60.771
NetC7_1: C7.1 R7.2 R8.2 REGOUT.TP U1.8 | length 19.8
  Top Layer w0.254: R8.2@52.642,65.396 R8.2@52.651,65.405 ; v1(56.896,62.484) 56.896,63.627 59.197,65.928 U1.8
  Top Layer w0.762: REGOUT.TP 48.001,65.463 50.424,65.463 R7.2 ; R7.2@50.482,65.396 R8.2@52.642,65.396 ; R8.2@52.651,65.405 v1(54.8,65.405) ; C7.1 55.6,61.024 56.799,62.223 56.799,62.387 v1(56.896,62.484)
  Bottom Layer w0.762: v1(54.8,65.405) 56.799,63.407 56.799,62.581 v1(56.896,62.484)
NetC8_1: C8.1 R14.1 REGSRC.TP U1.9 U1.10 | length 10.5
  Top Layer w0.254: C8.1 61.531,64.537 61.622,64.628 U1.10 U1.9 ; R14.1@64.099,62.592 cw(c64.099,62.493) R14.1
  Top Layer w0.762: REGSRC.TP 58.674,62.23 59.036,62.592 C8.1 61.581,62.543 64.149,62.543 R14.1
NetC10_1: C10.1 C11.2 R12.2 U1.18 | length 22.3
  Top Layer w0.254: U1.18 69.885,69.178 70.612,69.905 C11.2
  Bottom Layer w0.762: v1(76.01,74.93) 76.01,77.343 78.168,79.502 86.55,79.502 v1@89.637,76.415
  other v1: 89.471,76.581
NetC11_1: C11.1 C12.2 R13.2 U1.19 | length 5.9
  Top Layer w0.254: U1.19 67.693,69.836 68.502,69.836 69.196,70.529 69.196,72.495 70.237,73.536 C11.1 ; R13.2 R13.2@68.454,75.819
NetD1_2: D1.2 Q1.1-2-5-6 R9.2 | length 4.2
  Bottom Layer w0.762: v1(50.228,77.851) 50.228,77.714 51.117,76.825 v1(51.117,74.041)
NetD2_1: D2.1 R14.2 R18.2 | length 0.2
  Top Layer w0.254: R18.2 R18.2@64.373,58.348
NetF1_1: F1.1 R1.1 | length 2.7
  Top Layer w0.762: R1.1 73.673,56.633 cw(c73.673,56.515) F1.1
NetF2_1: F2.1 R2.1
NetF2_2: F2.2 P3.3 | length 5.7
  Top Layer w0.762: F2.2 92.283,61.722 93.045,62.484 P3.3
NetF3_1: F3.1 R3.1 | length 0.8
  Top Layer w0.254: R3.1@81.543,63.881 81.543,63.764 R3.1@82.041,63.266
NetF3_2: F3.2 P3.2 | length 5.7
  Top Layer w0.762: F3.2 87.753,64.28 87.957,64.484 P3.2
NetF4_1: F4.1 R4.1
NetF4_2: F4.2 P3.1 | length 5.5
  Top Layer w0.762: F4.2 87.785,66.453 93.186,66.453 P3.1
NetF5_1: F5.1 R5.1 | length 0.1
  Top Layer w0.254: R5.1@76.78,72.771 R5.1@76.78,72.921
NetJ2_3: J2.3 J2.4 X1.1A X1.1B
NetJ3_1: J3.1 R15.1 R16.1 TS1.TP U1.6 | length 21.2
  Top Layer w0.254: J3.1 J3.1@40.894,62.039 ; R15.1@44.72,62.622 R15.1 ; R16.1 47.744,62.995 54.232,62.995 58.465,67.228 U1.6
  Top Layer w0.762: TS1.TP J3.1@40.894,62.039
NetP1_1: P1.1 Q4.3 | length 24.5
  Top Layer w0.762: P1.1 50.856,52.546 51.203,52.893 70.095,52.893 Q4.3
NetP1_2: P1.2 R15.2 | length 13.9
  Top Layer w0.762: R15.2@44.994,60.905 44.994,50.992 45.44,50.546 P1.2
NetP1_3: P1.3 SW1.3 SW1.4 | length 18
  Top Layer w0.762: P1.3 50.768,48.546 52.419,46.895 SW1.3 SW1.4
NetQ2_2: Q2.2 Q3.2
NetQ3_3: Q3.3 R11.1 RSNS.4
NetR12_1: R12.1 RSNS.2 | length 25.6
  Top Layer w0.762: RSNS.2@70.993,86.006 70.993,84.138 73.215,81.915 88.518,81.915 91.845,78.589 91.845,78.339 91.889,78.295 R12.1
NetR13_1: R13.1 RSNS.3 | length 10.2
  Top Layer w0.762: RSNS.3@63.627,85.93 63.627,84.138 68.263,79.502 R13.1
NetR17_2: R17.2 U1.20 | length 2.7
  Top Layer w0.254: R17.2 67.686,73.117 U1.20
"SCL 3.3V": P2.1 R8.1 SCL.TP U1.5 | length 28.6
  Top Layer w0.254: 55.054,67.691 55.241,67.878 U1.5
  Top Layer w0.762: P2.1 40.164,74.39 40.513,74.041 42.989,74.041 SCL.TP 47.688,69.342 v1(49.721,69.342)
  Bottom Layer w0.762: v1(49.721,69.342) 53.404,69.342 v1(55.689,67.056)
"SDA 3.3V": P2.2 R7.1 SDA.TP U1.4 | length 27.3
  Top Layer w0.254: R7.1@50.632,67.446 51.13,67.944 51.13,68.094 51.564,68.528 U1.4
  Top Layer w0.762: P2.2 40.576,72.39 SDA.TP 45.645,67.321 R7.1
pads on no net: U1.11

## Polygon pours and split planes (outlines as drawn)
GND on Bottom Layer "GND_L02_P006" (solid, pour order 6): 28.892,81.28 cw(c31.432,81.28) 31.432,83.82 122.364,83.82 cw(c122.364,81.28) 124.904,81.28 124.904,27.178 cw(c121.571,27.178) 121.571,23.844 32.226,23.844 cw(c32.224,27.176) 28.892,27.178 28.892,74.93
GND on Bottom Layer "GND_L02_P000GND_L02_P000" (solid, pour order 0): 28.511,117.983 cw(c31.051,117.983) 31.051,120.523 123.571,120.523 cw(c123.571,117.983) 126.111,117.983 126.111,90.043 cw(c123.19,90.043) 123.19,87.122 31.051,87.122 cw(c31.051,89.662) 28.511,89.662 28.511,108.712
GND on Bottom Layer "GND_L02_P007" (solid, pour order 7): 110.045,87.694 110.045,82.995 111.697,82.995 111.697,87.694
BAT- on Top Layer "BAT-_L01_P095" (solid, pour order 95): 49.149,112.141 ccw(c46.99,112.141) 46.99,114.3 33.02,114.3 ccw(c33.02,111.76) 30.48,111.76 30.48,93.599 ccw(c31.496,93.599) 31.496,92.583 40.259,92.583 ccw(c40.259,93.345) 41.021,93.345 41.021,94.615 ccw(c40.386,94.615) 40.386,95.25 38.862,95.25 cw(c38.862,96.901) 37.211,96.901 37.211,99.822 cw(c39.751,99.822) 39.751,102.362 48.387,102.362 ccw(c48.387,103.124) 49.149,103.124
NetQ2_2 on Top Layer "NETQ2_2_L01_P094" (solid, pour order 94): 43.307,99.822 cw(c44.196,99.822) 44.196,100.711 56.515,100.711 cw(c56.515,99.568) 57.658,99.568 57.658,93.472 cw(c57.15,93.472) 57.15,92.964 44.831,92.964 cw(c44.831,94.488) 43.307,94.488
BAT+ on Top Layer "BAT+_L01_P093" (solid, pour order 93): 63.373,53.975 ccw(c63.5,53.975) 63.5,53.848 78.994,53.848 ccw(c78.994,54.229) 79.375,54.229 79.375,57.277 ccw(c79.121,57.277) 79.121,57.531 76.327,57.531 ccw(c76.327,57.15) 75.946,57.15 75.946,55.372 cw(c75.692,55.372) 75.692,55.118 69.596,55.118 cw(c69.596,55.499) 69.215,55.499 69.215,56.261 ccw(c68.453,56.261) 68.453,57.023 63.627,57.023 ccw(c63.627,56.769) 63.373,56.769
GND on Top Layer "GND_L01_P091" (solid, pour order 91): 69.723,77.47 ccw(c69.977,77.47) 69.977,77.216 78.232,77.216 cw(c78.232,76.835) 78.613,76.835 78.613,75.311 ccw(c78.867,75.311) 78.867,75.057 80.772,75.057 cw(c80.772,74.676) 81.153,74.676 81.153,71.882 cw(c80.772,71.882) 80.772,71.501 76.454,71.501 ccw(c76.454,71.247) 76.2,71.247 76.2,69.088 ccw(c76.581,69.088) 76.581,68.707 85.725,68.707 ccw(c85.725,69.469) 86.487,69.469 86.487,77.851 ccw(c85.598,77.851) 85.598,78.74 69.977,78.74 ccw(c69.977,78.486) 69.723,78.486
NetF5_1 on Top Layer "NETF5_1_L01_P090" (solid, pour order 90): 76.327,72.39 76.327,72.263 ccw(c76.581,72.263) 76.581,72.009 80.391,72.009 ccw(c80.391,72.136) 80.518,72.136 80.518,73.533 ccw(c80.391,73.533) 80.391,73.66 76.454,73.66 ccw(c76.454,73.533) 76.327,73.533 76.327,72.263 ccw(c76.581,72.263) 76.581,72.009
GND on Top Layer "GND_L01_P089" (solid, pour order 89): 62.484,60.706 62.484,56.388 cw(c61.341,56.388) 61.341,55.245 47.498,55.245 cw(c47.498,56.261) 46.482,56.261 46.482,60.96 cw(c46.863,60.96) 46.863,61.341 48.006,61.341 cw(c48.006,61.214) 48.133,61.214 48.133,58.42 ccw(c48.514,58.42) 48.514,58.039 51.308,58.039 ccw(c51.308,58.674) 51.943,58.674 51.943,59.69 cw(c52.197,59.69) 52.197,59.944 56.261,59.944 cw(c56.261,59.69) 56.515,59.69 56.515,59.055 ccw(c56.896,59.055) 56.896,58.674 60.325,58.674 ccw(c60.325,58.928) 60.579,58.928 60.579,60.579 cw(c60.706,60.579) 60.706,60.706
NetC10_1 on Top Layer "NETC10_1_L01_P085" (solid, pour order 85): 69.723,70.358 ccw(c69.85,70.358) 69.85,70.231 73.025,70.231 ccw(c73.025,70.612) 73.406,70.612 73.406,73.533 cw(c73.914,73.533) 73.914,74.041 76.454,74.041 ccw(c76.454,74.422) 76.835,74.422 76.835,75.438 ccw(c76.581,75.438) 76.581,75.692 72.771,75.692 ccw(c72.771,75.438) 72.517,75.438 72.517,71.628 cw(c72.136,71.628) 72.136,71.247 69.85,71.247 ccw(c69.85,71.12) 69.723,71.12
NetC11_1 on Top Layer "NETC11_1_L01_P084" (solid, pour order 84): 67.437,76.2 cw(c67.691,76.2) 67.691,76.454 68.834,76.454 cw(c68.834,76.073) 69.215,76.073 ccw(c69.723,76.073) 69.723,75.565 71.374,75.565 cw(c71.374,75.311) 71.628,75.311 71.628,73.152 cw(c71.501,73.152) 71.501,73.025 69.977,73.025 cw(c69.977,73.279) 69.723,73.279 69.723,74.168 ccw(c69.215,74.168) 69.215,74.676 67.691,74.676 cw(c67.691,74.93) 67.437,74.93
NetC5_1 on Top Layer "NETC5_1_L01_P083" (solid, pour order 83): 75.565,69.85 ccw(c75.565,70.104) 75.819,70.104 75.819,73.279 ccw(c75.565,73.279) 75.565,73.533 74.295,73.533 ccw(c74.295,73.406) 74.168,73.406 74.168,69.977 ccw(c74.295,69.977) 74.295,69.85 74.549,69.85
NetC1_2 on Top Layer "NETC1_2_L01_P081" (solid, pour order 81): 70.295,58.166 ccw(c70.548,58.166) 70.549,57.912 75.248,57.912 ccw(c75.248,58.166) 75.502,58.166 75.502,59.182 ccw(c75.375,59.182) 75.375,59.309 70.549,59.309 ccw(c70.548,59.055) 70.295,59.055
NetC1_1 on Top Layer "NETC1_1_L01_P080" (solid, pour order 80): 74.041,59.944 ccw(c74.295,59.944) 74.295,59.69 78.232,59.69 ccw(c78.232,60.071) 78.613,60.071 78.613,62.357 ccw(c78.486,62.357) 78.486,62.484 74.295,62.484 ccw(c74.295,62.23) 74.041,62.23
NetF2_1 on Top Layer "NETF2_1_L01_P079" (solid, pour order 79): 79.375,60.706 ccw(c79.629,60.706) 79.629,60.452 85.217,60.452 ccw(c85.217,60.706) 85.471,60.706 85.471,62.357 ccw(c85.217,62.357) 85.217,62.611 84.328,62.611 ccw(c84.328,62.484) 84.201,62.484 cw(c83.693,62.484) 83.693,61.976 79.629,61.976 ccw(c79.629,61.722) 79.375,61.722
NetF3_1 on Top Layer "NETF3_1_L01_P078" (solid, pour order 78): 80.899,63.119 ccw(c81.153,63.119) 81.153,62.865 82.423,62.865 ccw(c82.423,62.992) 82.55,62.992 cw(c82.804,62.992) 82.804,63.246 85.09,63.246 ccw(c85.09,63.627) 85.471,63.627 85.471,64.643 ccw(c85.09,64.643) 85.09,65.024 81.153,65.024 ccw(c81.153,64.77) 80.899,64.77
NetF4_1 on Top Layer "NETF4_1_L01_P077" (solid, pour order 77): 82.042,65.659 ccw(c82.296,65.659) 82.296,65.405 85.407,65.405 ccw(c85.407,65.644) 85.646,65.644 85.646,67.008 ccw(c85.344,67.008) 85.344,67.31 82.296,67.31 ccw(c82.296,67.056) 82.042,67.056
NetC2_1 on Top Layer "NETC2_1_L01_P076" (solid, pour order 76): 74.041,63.119 ccw(c74.295,63.119) 74.295,62.865 79.883,62.865 ccw(c79.883,63.119) 80.137,63.119 80.137,64.135 ccw(c79.883,64.135) 79.883,64.389 74.295,64.389 ccw(c74.295,64.135) 74.041,64.135
NetC3_1 on Top Layer "NETC3_1_L01_P075" (solid, pour order 75): 75.946,65.024 ccw(c76.327,65.024) 76.327,64.643 77.597,64.643 ccw(c77.597,64.897) 77.851,64.897 cw(c78.359,64.897) 78.359,65.405 81.026,65.405 ccw(c81.026,65.532) 81.153,65.532 81.153,67.945 ccw(c80.899,67.945) 80.899,68.199 76.2,68.199 ccw(c76.2,67.945) 75.946,67.945
BAT+ on Top Layer "BAT+_L01_P074" (solid, pour order 74): 94.615,94.488 ccw(c96.52,94.488) 96.52,92.583 98.933,92.583 cw(c98.933,92.456) 99.06,92.456 ccw(c99.314,92.456) 99.314,92.202 100.711,92.202 ccw(c100.711,92.456) 100.965,92.456 cw(c101.219,92.456) 101.219,92.71 111.252,92.71 cw(c111.252,92.456) 111.506,92.456 ccw(c112.776,92.456) 112.776,91.186 124.079,91.186 ccw(c124.079,93.091) 125.984,93.091 125.984,118.745 ccw(c124.079,118.745) 124.079,120.65 51.943,120.65 ccw(c51.943,119.126) 50.419,119.126 50.419,106.299 ccw(c52.959,106.299) 52.959,103.759 68.453,103.759 ccw(c68.453,106.299) 70.993,106.299 70.993,111.506 cw(c73.533,111.506) 73.533,114.046 117.771,114.046 cw(c117.771,111.506) 120.311,111.506 120.311,100.729 cw(c119.658,100.729) 119.658,100.076 96.393,100.076 ccw(c96.393,98.298) 94.615,98.298
GND on Top Layer "GND_L01_P073" (solid, pour order 73): 110.109,88.519 cw(c108.839,88.519) 108.839,87.249 69.977,87.249 cw(c69.977,87.947) 69.278,87.947 69.278,94.31 cw(c70.218,94.31) 70.218,95.25 74.041,95.25 ccw(c74.041,96.52) 75.311,96.52 75.311,106.045 cw(c77.597,106.045) 77.597,108.331 80.264,108.331 cw(c80.264,106.553) 82.042,106.553 82.042,94.488 ccw(c84.582,94.488) 84.582,91.948 97.155,91.948 cw(c97.155,91.567) 97.536,91.567 100.457,91.567 cw(c100.457,91.059) 100.965,91.059 ccw(c101.473,91.059) 101.473,90.551 109.093,90.551 cw(c109.093,89.535) 110.109,89.535
NetJ2_3 on Top Layer "NETJ2_3_L01_P072" (solid, pour order 72): 92.075,96.139 cw(c90.424,96.139) 90.424,94.488 87.884,94.488 cw(c87.884,95.885) 86.487,95.885 86.487,109.728 cw(c88.138,109.728) 88.138,111.379 116.332,111.379 cw(c116.332,109.093) 118.618,109.093 118.618,102.743 cw(c117.221,102.743) 117.221,101.346 93.345,101.346 ccw(c93.345,100.076) 92.075,100.076
NetC10_1 on Top Layer "NETC10_1_L01_P041" (solid, pour order 41): 92.848,75.685 cw(c92.594,75.685) 92.594,75.431 88.784,75.431 cw(c88.784,76.066) 88.149,76.066 88.149,77.209 cw(c88.657,77.209) 88.657,77.717 90.562,77.717 cw(c90.562,77.336) 90.943,77.336 ccw(c91.324,77.336) 91.324,76.955 92.848,76.955
NetD1_2 on Top Layer "NETD1_2_L01_P054" (solid, pour order 54): 50.355,76.708 ccw(c50.355,77.47) 51.117,77.47 51.117,77.978 ccw(c50.355,77.978) 50.355,78.74 45.021,78.74 ccw(c45.021,78.486) 44.767,78.486 cw(c44.514,78.486) 44.514,78.232 41.465,78.232 ccw(c41.465,77.851) 41.084,77.851 41.084,77.343 ccw(c41.719,77.343) 41.719,76.708 48.578,76.708
NetQ3_3 on Top Layer "NETQ3_3_L01_P053" (solid, pour order 53): 64.008,95.123 62.166,95.123 ccw(c62.166,93.599) 60.642,93.599 cw(c58.992,93.599) 58.991,91.948 56.706,91.948 ccw(c56.705,90.805) 55.562,90.805 55.562,88.773 ccw(c56.959,88.773) 56.959,87.376 cw(c56.959,85.217) 59.118,85.217 59.118,82.169 ccw(c59.627,82.169) 59.627,81.661 59.753,81.661 ccw(c59.753,82.042) 60.134,82.042 60.134,86.741 cw(c61.023,86.741) 61.023,87.63 64.008,87.63 ccw(c64.135,88.392) 64.897,88.265 64.897,94.234 ccw(c64.008,94.234)
GND on Top Layer "GND_L01_P044" (solid, pour order 44): 38.672,61.087 ccw(c38.672,61.976) 39.56,61.976 39.56,65.786 ccw(c38.163,65.786) 38.163,67.183 31.051,67.183 ccw(c31.051,66.04) 29.909,66.04 29.909,62.23 ccw(c31.051,62.23) 31.051,61.087 31.432,61.087
NetD2_1 on Top Layer "NETD2_1_L01_P029" (solid, pour order 29): 63.691,57.912 cw(c63.691,58.039) 63.563,58.039 63.563,59.817 ccw(c63.436,59.817) 63.436,59.944 63.436,60.833 cw(c63.691,60.833) 63.691,61.087 68.008,61.087 cw(c68.008,60.96) 68.135,60.96 68.135,58.674 cw(c67.754,58.674) 67.754,58.293 65.468,58.293 ccw(c65.468,58.039) 65.215,58.039 cw(c65.087,58.039) 65.087,57.912 64.706,57.912
"SCL 3.3V" on Top Layer "SCL_3.3V_L01_P033" (solid, pour order 33): 52.133,66.929 54.927,66.929 cw(c54.927,66.802) 55.054,66.802 ccw(c55.435,66.802) 55.435,66.421 55.944,66.421 ccw(c55.944,66.929) 56.451,66.929 56.451,67.31 ccw(c55.689,67.31) 55.689,68.072 52.387,68.072 ccw(c52.387,67.818) 52.133,67.818
NetJ3_1 on Top Layer "NETJ3_1_L01_P034" (solid, pour order 34): 49.085,62.357 cw(c48.831,62.357) 48.831,62.103 42.735,62.103 ccw(c42.735,61.722) 42.355,61.722 42.355,61.595 cw(c41.974,61.595) 41.974,61.214 40.195,61.214 cw(c40.195,61.341) 40.069,61.341 40.069,63.119 cw(c40.195,63.119) 40.195,63.246 48.959,63.246 cw(c48.959,63.119) 49.085,63.119 49.085,62.992
GND on Top Layer "GND_L01_P037" (solid, pour order 37): 46.672,72.263 ccw(c47.18,72.263) 47.18,71.755 47.816,71.755 ccw(c47.816,72.263) 48.323,72.263 48.323,72.771 ccw(c47.688,72.771) 47.688,73.406 47.18,73.406 ccw(c47.18,72.898) 46.672,72.898
NetD1_2 on Top Layer "NETD1_2_L01_P038" (solid, pour order 38): 50.017,72.009 50.017,73.83 cw(c51.117,73.83) 51.117,74.93 cw(c51.117,73.83) 52.218,73.83 52.218,72.009

## Silkscreen, mask and mechanical layers (free items; w line width, h text height)
Top Overlay:
  drawing of 13 lines, arcs and shapes, not listed
  text "BMS V5" at 29.909,118.999 h0.51
  text "Alex^2" at 30.035,117.602 h0.51
  text "BAT+" at 53.34,113.03 h0.51
  text "BAT- (NOT GND)" at 42.481,112.903 h0.51
  text "12V Bat+" at 86.233,110.617 h0.51
  text "15A Blade Fuse" at 121.983,93.599 h0.51 r90
  text "SCL" at 33.084,73.66 h0.51
  text "SDA" at 33.084,71.755 h0.51
  text "ALERT" at 31.941,69.723 h0.51
  text "VC1" at 95.885,66.294 h0.51
  text "VC2" at 95.885,64.008 h0.51
  text "VC3/4" at 95.885,61.849 h0.51
  text "GND" at 38.1,59.182 h0.51
  text "TS1" at 40.259,59.182 h0.51
  text "Boot Circuit Boot" at 38.481,51.689 h0.51
  text "Push Button Boot" at 38.862,49.276 h0.51